# EAGLE board 30V_to_1V8 (EAGLE 7.2.0)
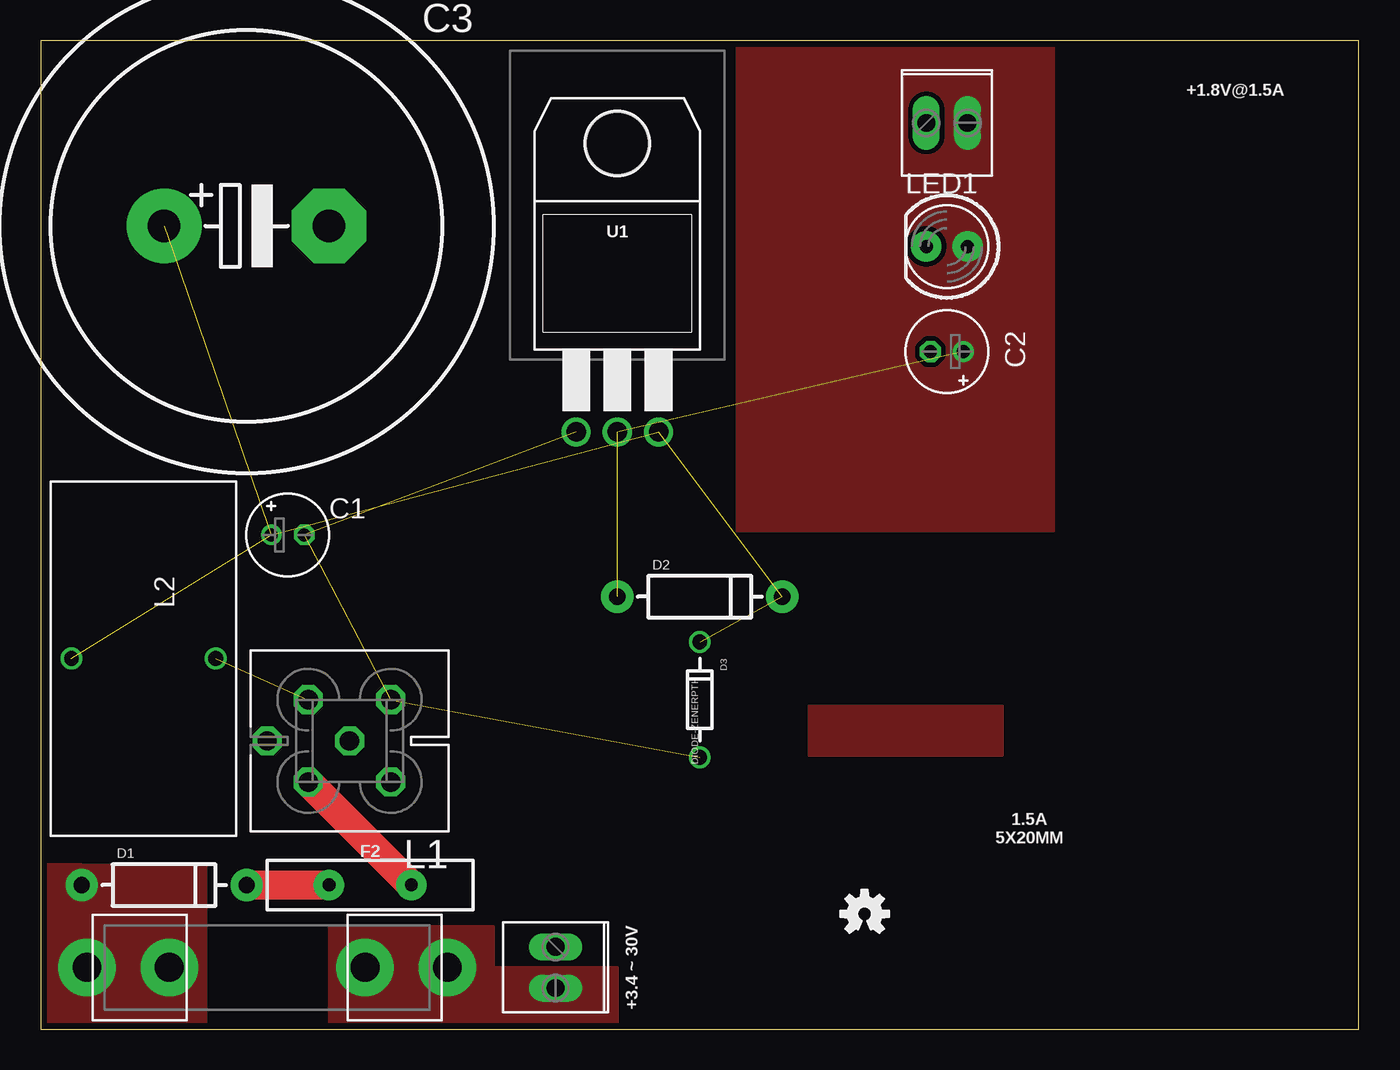
[diagram p0: board, top side]
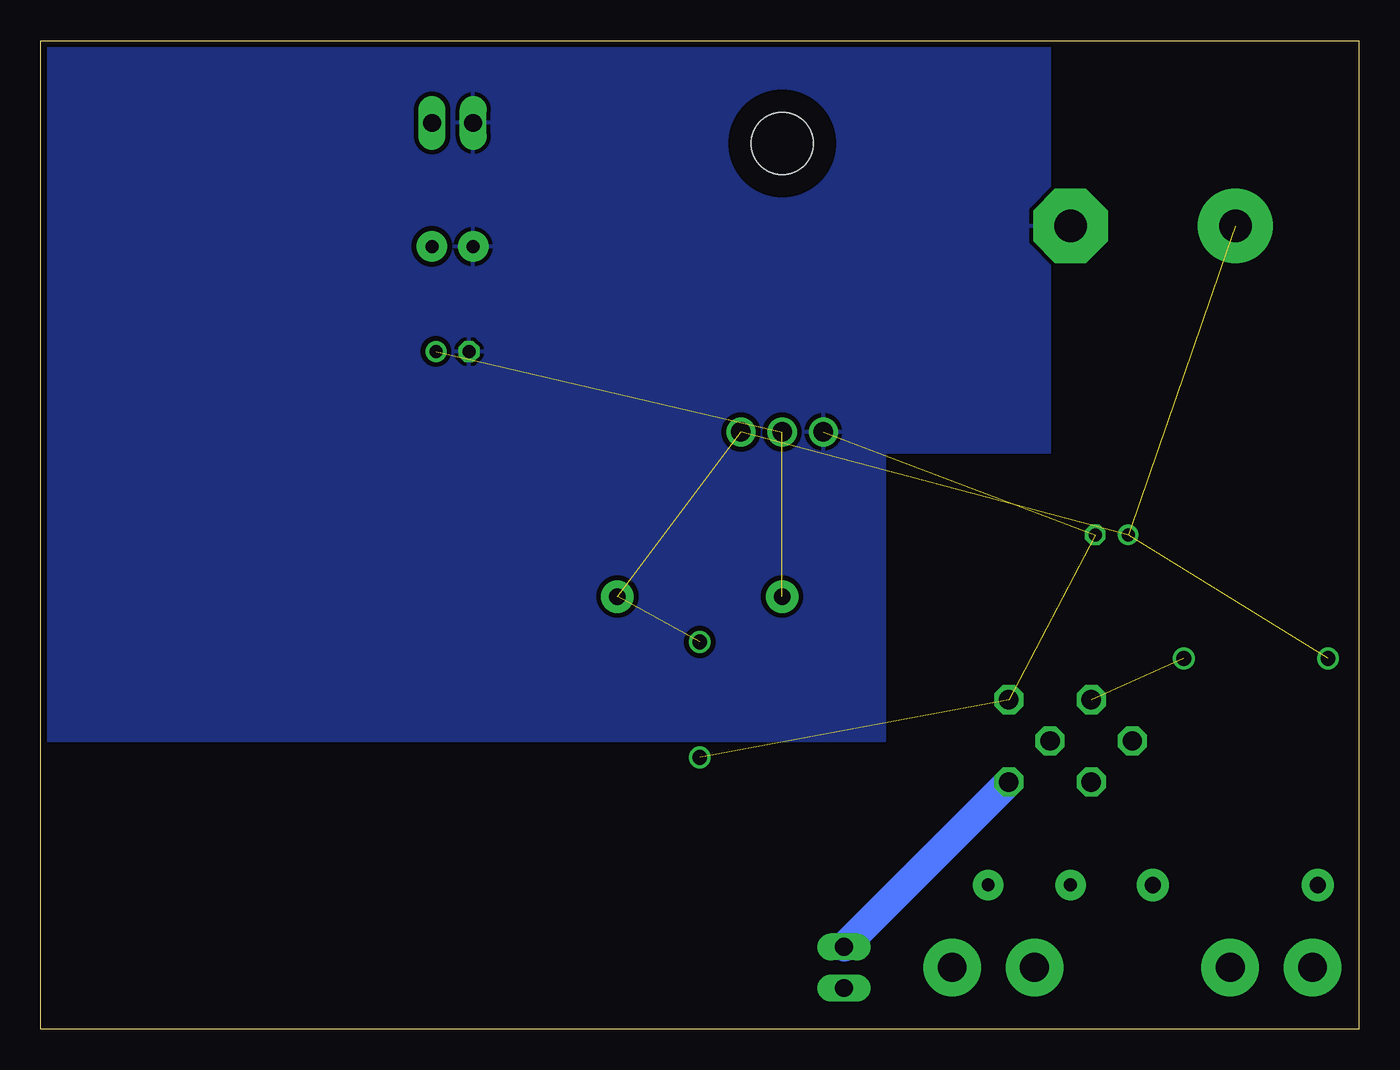
[diagram p1: board, bottom side, seen from below]

Size 81.28 x 60.96 mm. Coordinates in mm from the lower left corner, seen from the top.
Outline: 0,0 81.28,0 81.28,60.96 0,60.96 0,0
Copper layers (1*16): Top 0.0356mm / dielectric 1.5011mm / Bottom 0.0356mm
Design rules "oshpark-2layer": minimum track width 6mil, minimum drill 13mil, track to track 6mil, track to pad 6mil, pad to pad 6mil, via to via 6mil, smd to smd 6mil, copper to edge 15mil, drill to drill 6mil, minimum pad ring 7mil, minimum via ring 7mil, stop-mask expansion 4mil, vias tented up to drill 0mil, thermal gap 10mil

## Footprints (pad centres in the part's own frame; a part is rotated, then mirrored left to right if it is on the bottom)
E2-5 = drill 0.813 pad 1.27: + -1.016,0 | drill 0.813 pad 1.27 octagon: - 1.016,0
EB30D = drill 2.007 pad 4.597: + -5.08,0 | drill 2.007 pad 4.597 octagon: - 5.08,0
DIODE-1N4001 = drill 1 pad 1.981: A -5.08,0; C 5.08,0
DIODE-ZENER = drill 0.9: P$1 -3.556,0; P$2 3.556,0
FUSE_1A3399 = drill 1.778 pad 3.556: 1 0,-11.113; 2 0,-6.032; 3 0,6.032; 4 0,11.113
PTC = drill 0.8 pad 1.88: P$1 -2.54,0; P$2 2.54,0
1X02_282834-2 = drill 1.1 long: P$1 -1.27,0; P$2 1.27,0
BNX002 = drill 1.194 octagon: B 2.54,2.54; CB 2.54,-2.54; CG -2.54,-2.54; CG1 0,0; CG2 5.08,0; PSG -2.54,2.54
2121-RC-VERT = drill 0.9: 1 -4.445,0; 2 4.445,0
LED5MM = drill 0.813 pad 1.88: A -1.27,0; K 1.27,0
TO-220-SINGLE = drill 1.2: GND -2.54,-17.78; IN 2.54,-17.78; OUT 0,-17.78 | hole 3.8: 0,0

## Placement (x,y rotation side)
C1  10uF  [E2-5]  15.24,30.48 0 top
C2  10uF  [E2-5]  55.88,41.78 180 top
C3  [EB30D]  12.7,49.53 0 top
D1  [DIODE-1N4001]  7.62,8.89 0 top
D2  [DIODE-1N4001]  40.64,26.67 0 top
D3  DIODE-ZENERPTH  [DIODE-ZENER]  40.64,20.32 270 top
F1  FUSE5X20MM  [FUSE_1A3399]  13.97,3.81 90 top
F2  PTCPTH  [PTC]  20.32,8.89 0 top
JP1  [1X02_282834-2]  31.75,3.81 270 top
JP2  [1X02_282834-2]  55.88,55.88 0 top
L1  BNX002  [BNX002]  19.05,17.78 180 top
L2  2121-RC-VERT  [2121-RC-VERT]  6.35,22.86 180 top
LED1  [LED5MM]  55.88,48.26 180 top
U1  V_REG_LD1086V  [TO-220-SINGLE]  35.56,54.61 0 top
U$1  [OSHW-LOGO-S]  50.8,7.11 0 top

## Library data of the parts
C1-C3 = rcl
D1-D3 = SparkFun-DiscreteSemi
F1 F2 JP1 JP2 L2 U1 = DensityAltitude
L1 = inductors
LED1 = SparkFun-LED
U$1 = SparkFun-Aesthetics

## Nets
DIODE1: D1.C F2.P$1
FILTERED: C1.+ C3.+ D2.C D3.P$1 L2.2 U1.IN
FUSE1: D1.A F1.3 F1.4
FUSE2: F2.P$2 L1.B
GND: C1.- C2.- C3.- D3.P$2 JP2.P$1 L1.CG LED1.K U1.GND
N$1: L1.CB L2.1
N$3: JP1.P$1 L1.PSG
VCC: C2.+ D2.A JP2.P$2 LED1.A U1.OUT
VIN: F1.1 F1.2 JP1.P$2

## Tracks (layer width: path | path; a pad name or v marks a point on that pad's centre or on a via)
DIODE1
  Top 1.778: D1.C F2.P$1
FILTERED  (5 unrouted)
FUSE1
  pour Top (isolate 0.305, no thermals): 0,10.16 10.16,10.03 10.16,0.25 0,0.38
FUSE2
  Top 1.778: F2.P$2 L1.B
  pour Top (isolate 0.305, no thermals): 47.37,19.94 59.31,19.94 59.31,16.89 47.37,16.89
GND  (3 unrouted)
  pour Bottom (isolate 0.305): 19.05,60.96 81.28,60.96 81.28,17.78 29.21,17.78 29.21,35.56 19.05,35.56
N$1  (1 unrouted)
N$3
  Bottom 1.778: JP1.P$1 L1.PSG
VCC  (2 unrouted)
  pour Top (isolate 0.305, no thermals): 42.93,60.71 42.93,30.73 62.48,30.73 62.48,60.71
VIN
  pour Top (isolate 0.305, no thermals): 17.78,6.35 17.78,0 35.56,0 35.56,3.81 27.94,3.81 27.94,6.35

## Text on the board
tPlace: +1.8V@1.5A | 1.5A / 5X20MM | +3.4 ~ 30V